# Altium PCB MapaSensorChassi002.PcbDoc
Units mil, origin at the board's own origin, x right, y up, seen from the top; angles counter-clockwise.
Board outline 6000 x 4000 mil, 2 copper layers (Top Layer, Bottom Layer); 26 components, 43 nets, 128 pads, 2 vias.
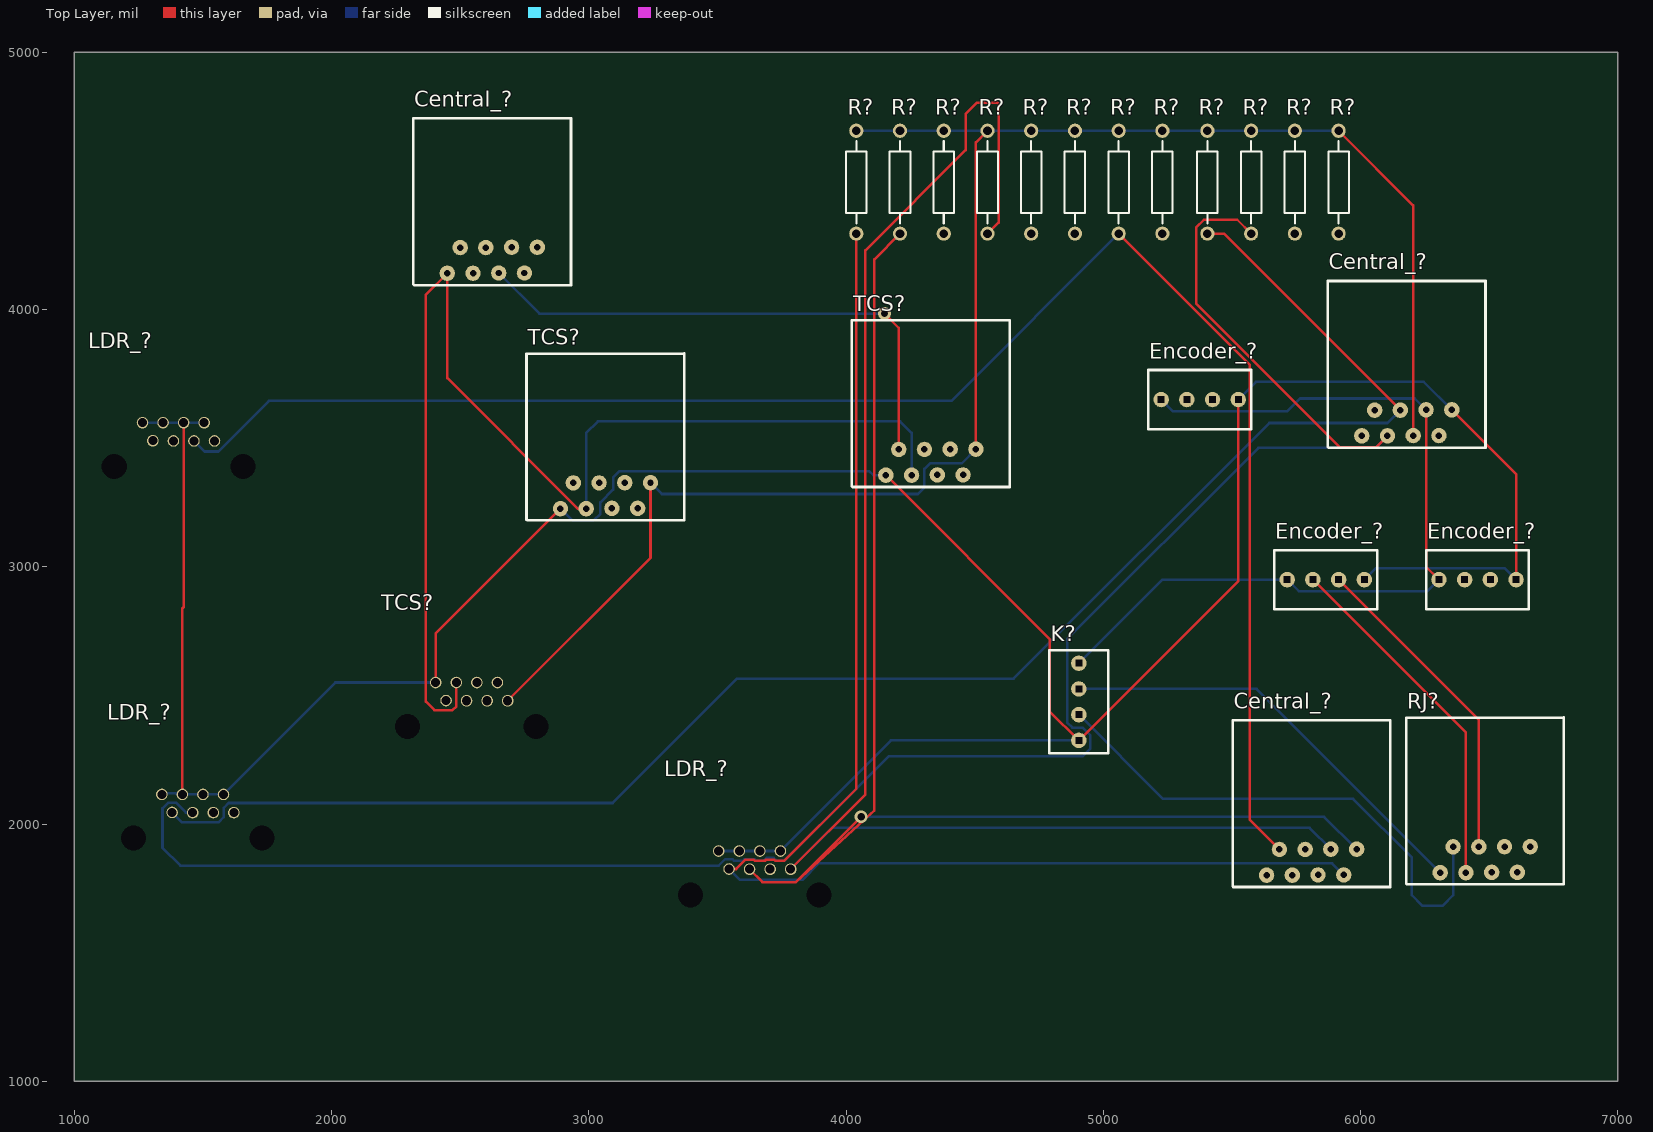
[diagram p0: Top Layer view]
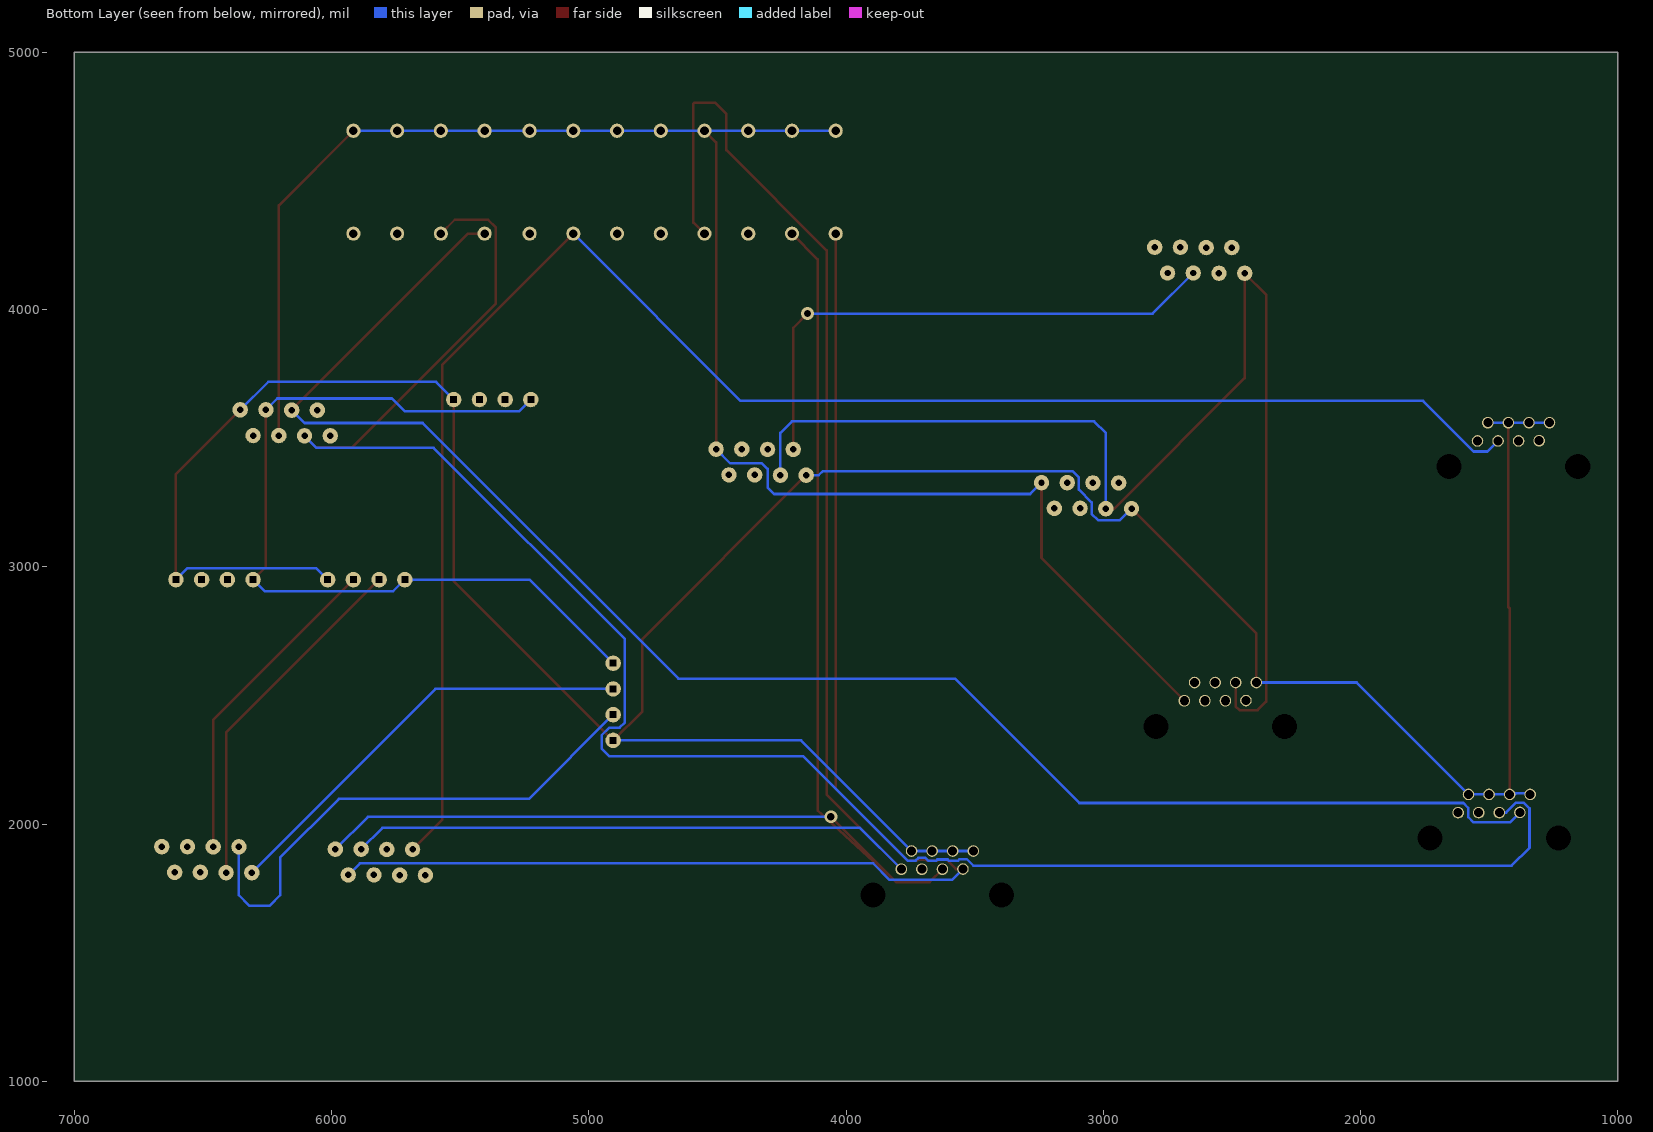
[diagram p1: Bottom Layer view, seen from below]
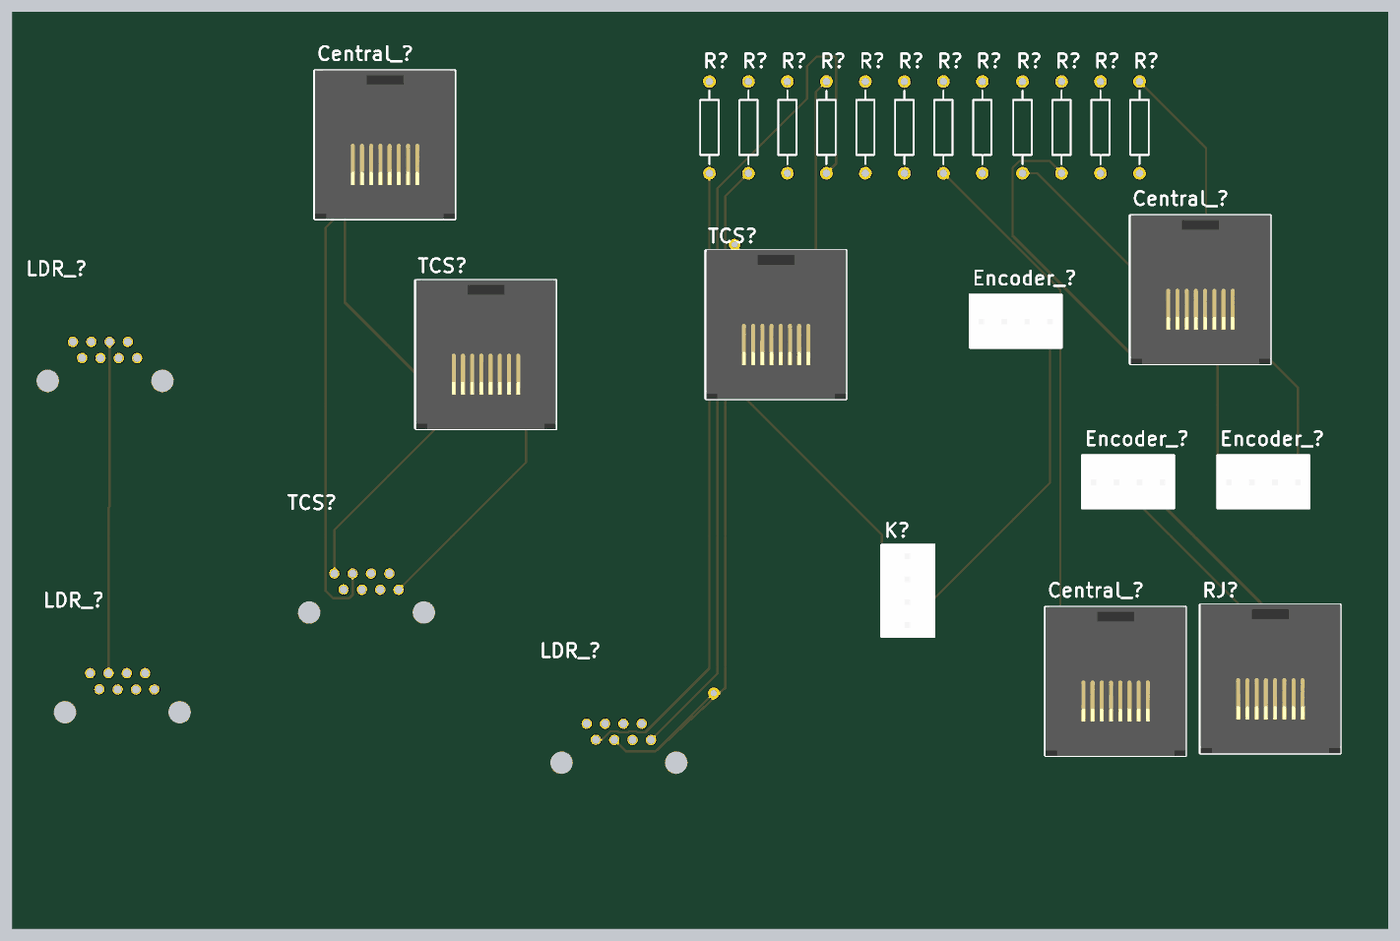
[diagram p2: 3D render of the assembled board from above, using the file's embedded part models]

## Layer stack, top to bottom
Top Solder: solder mask 0.4, Solder Resist, Dk 3.5
Top Layer: signal copper 1.4
Dielectric 1: dielectric 12.6, FR-4, Dk 4.8
Bottom Layer: signal copper 1.4
Bottom Solder: solder mask 0.4, Solder Resist, Dk 3.5

## Board outline
1000,1000 7000,1000 7000,5000 1000,5000

## Design rules (kind name [scope] priority, off if disabled: settings)
Clearance [All] p1: gap=10 ignorepadtopadclearanceinfootprint=FALSE except(0: Arc-Hole Track-Hole SMDPad-Hole THPad-Hole Via-Hole Fill-Hole Poly-Hole Region-Hole Text-Hole)
PolygonConnect [All] p1: connectstyle=Relief reliefconductorwidth=10 reliefentries=4 polygonreliefangle="90 Angle" airgapwidth=10
RoomDefinition MapaSensorChassi002 [InComponentClass('MapaSensorChassi002')] p1: confinementstyle=ConfineIn formatcopy=TRUE lockcomponents=FALSE outline 280,505 1040,505 1040,1035 280,1035
RoutingVias [All] p1: holewidth=28 width=50 viastyle="Through Hole" minholewidth=28 minwidth=50 maxholewidth=28 maxwidth=50
SolderMaskExpansion [All] p1: expansion=4
Width [All] p1: maxlimit=10 minlimit=10 preferedwidth=10
30 further rules are at their usual default settings.

## Classes and differential pairs
component class MapaSensorChassi002: Central_? Encoder_? K? LDR_? R? RJ? TCS?

## Components (designator, comment, footprint, x,y, rotation, side; value= is the part's Value field where it differs from the comment)
Central_? "RJ45" RJ45_90 5625,2260 r0 top
Central_? "RJ45" RJ45_90 2440,4600 r0 top
Central_? "RJ45" RJ45_90 5995,3968 r0 top
Encoder_? "Encoder_3" 4-vias 5715,2950 r90 top
Encoder_? "Encoder_2" 4-vias 6305,2950 r90 top
Encoder_? "Encoder1" 4-vias 5225,3650 r90 top
K? "Encoder_4" 4-vias 4905,2625 r0 top
LDR_? "RJ45" RJ45_Simples 3395.32,1724.92 r0 top
LDR_? "RJ45" RJ45_Simples 1155.32,3389.92 r0 top
LDR_? "RJ45" RJ45_Simples 1230.39,1944.92 r0 top
R? "Res2" AXIAL-0.4 5745,4495 r90 top value=1K
R? "Res2" AXIAL-0.4 5575,4495 r90 top value=1K
R? "Res2" AXIAL-0.4 4040,4495 r90 top value=1K
R? "Res2" AXIAL-0.4 4550,4495 r90 top value=1K
R? "Res2" AXIAL-0.4 4380,4495 r90 top value=1K
R? "Res2" AXIAL-0.4 4210,4495 r90 top value=1K
R? "Res2" AXIAL-0.4 5915,4495 r90 top value=1K
R? "Res2" AXIAL-0.4 5405,4495 r90 top value=1K
R? "Res2" AXIAL-0.4 5230,4495 r90 top value=1K
R? "Res2" AXIAL-0.4 4720,4495 r90 top value=1K
R? "Res2" AXIAL-0.4 4890,4495 r90 top value=1K
R? "Res2" AXIAL-0.4 5060,4495 r90 top value=1K
RJ? "RJ45" RJ45_90 6300,2270 r0 top
TCS? "RJ45" RJ45_Simples 2295.16,2379.92 r0 top
TCS? "RJ45" RJ45_90 4145,3815 r0 top
TCS? "RJ45" RJ45_90 2880,3685 r0 top

## Footprints (in the part's own frame and the unit in brackets; to place one, negate y for a bottom-side part, rotate by r counter-clockwise, add the part's x,y. Pads: shape width x height; smd on the part's side, far side on the other; paste and mask are expansions set on the pad)
4-vias [mil]
  round 60 hole 25.2 square: 1(0,0) 2(0,-100) 3(0,-200) 4(0,-300)
  silkscreen extent -115,-350 115,50, body extent -115,-350 115,50, height 460
AXIAL-0.4 [mm] "Axial Device, Thru-Hole; 2 Leads; 0.4 in Pin Spacing"
  round 1.4 hole 0.85: 1(-5.08,0) 2(5.08,0)
  silkscreen extent -4.06,-1.02 4.06,1.02
RJ45_90 [mil]
  round 60 hole 25.2: 1(360,-358) 2(310,-458) 3(260,-358) 4(210,-458) 5(160,-359) 6(110,-459) 7(60,-359) 8(10,-459)
  silkscreen extent -122,-505 491,144, body extent -119,-505 491,145, height 630
RJ45_Simples [mil] "Sem led nessas porra - 8P8C"
  round 0 hole 97.24: 0(0,0) 0(500,0)
  round 45 hole 35: 1(389.76,99.21) 2(349.61,170.08) 3(309.84,99.21) 4(269.68,170.08) 5(229.92,99.21) 6(189.76,170.08) 7(150,100) 8(109.84,170.08)
  body extent -61,-217 561,421, height 506

## Part data
Encoder_? Encoder_? Encoder_? K?: library part KK4Vias, ComponentLink1Description=Fabricante, ComponentLink1URL=https://www.molex.com/molex/products/family?key=kk_254_rpc_connector_system&channel=products&chanName=family&pageTitle=Introduction&parentKey=kk_interconnect_solutions
R? R? R? R? R? R? R? R? R? R? R? R?: "Resistor", LatestRevisionDate=17-Jul-2002, LatestRevisionNote="Re-released for DXP Platform.", PackageDescription="Axial Device, Thru-Hole; 2 Leads; 0.4 in Pin Spacing", PackageReference=AXIAL-0.4, Published=8-Jun-2000, Publisher="Altium Limited"

## Via types
v1: diameter 50, hole 28, Top Layer to Bottom Layer, 2 vias

## Nets (pads, with @x,y where several pads share a name; then routed paths per layer and width w, separated by ;. In a path a pad name is that pad's centre, name@x,y a point inside that pad or via, vN(x,y) a via of type N, cw(c..) or ccw(c..) an arc to the next point about the centre after c; other vN are vias at no path point)
3.3V: Central_?.3@6255,3610 Encoder_?.1 K?.1 | length 3339.8
  Top Layer w10: Central_?.3@6255,3610 6255,3000 Encoder_?.1@6305,2950
  Bottom Layer w10: K?.1 5230,2950 5715,2950 5760,2905 6260,2905 Encoder_?.1@6305,2950 ; Encoder_?.1@5225,3650 5270,3605 5716,3605 5765,3654 6211,3654 Central_?.3@6255,3610
5VCC: Central_?.4@6205,3510 R?.2 TCS?.1 | length 6912
  Top Layer w10: TCS?.1@2684.92,2479.13 3240,3034.21 TCS?.1@3240,3327 ; TCS?.1@4505,3457 4505,4650 R?.2@4550,4695 ; R?.2@5915,4695 6205,4405 Central_?.4@6205,3510
  Bottom Layer w10: TCS?.1@3240,3327 3284,3283 4280,3283 4305,3308 4305,3380 4327,3402 4450,3402 TCS?.1@4505,3457 ; R?.2@4040,4695 4210,4695 4380,4695 4550,4695 4720,4695 4890,4695 5060,4695 5230,4695 5405,4695 5575,4695 5745,4695 R?.2@5915,4695
GND: Central_?.1@6355,3610 Encoder_?.4 K?.4 LDR_?.2 LDR_?.4 LDR_?.6 LDR_?.8 TCS?.8 | length 12033.6
  Top Layer w10: LDR_?.6@1420.16,2115 1420.16,2838 1425,2842.84 LDR_?.4@1425,3560 ; TCS?.8@2405,2550 2405,2741 TCS?.8@2890,3226 ; TCS?.8@4155,3356 4792,2719 4792,2438 K?.4 5525,2945 Encoder_?.4@5525,3650 ; Central_?.1@6355,3610 6605,3360 Encoder_?.4@6605,2950
  Bottom Layer w10: LDR_?.8@1265.16,3560 1345.08,3560 1425,3560 LDR_?.2@1504.92,3560 ; LDR_?.8@1340.24,2115 1344.7,2119.47 1397.74,2119.47 1397.74,2115 1420.16,2115 1500.08,2115 1580,2115 2015,2550 TCS?.8@2405,2550 ; TCS?.8@2890,3226 2935,3181 3020,3181 3045,3206 3045,3250 3095,3300 3095,3347 3120,3372 4090,3372 4106,3356 TCS?.8@4155,3356 ; LDR_?.8@3505.16,1895 3585.08,1895 3665,1895 3744.92,1895 4174.92,2325 K?.4 ; Encoder_?.4@5525,3650 5594,3719 6246,3719 Central_?.1@6355,3610 ; Encoder_?.4@6015,2950 6060,2995 6560,2995 Encoder_?.4@6605,2950
NetCentral_1_1: 
NetCentral_1_2: 
NetCentral_1_3: 
NetCentral_1_4: 
NetCentral_1_5: 
NetCentral_1_6: 
NetCentral_1_7: 
NetCentral_1_8: 
NetCentral_2_1: 
NetCentral_2_2: 
NetCentral_2_3: 
NetCentral_2_4: 
NetCentral_2_5: 
NetCentral_2_6: 
NetCentral_2_7: 
NetCentral_2_8: 
NetCentral_3_5: 
NetCentral_3_6: 
NetCentral_3_7: 
NetCentral_3_8: 
NetCentral_?_1: Central_?.1@5985,1902 LDR_?.5@3625.24,1824.13 R?.1@4210,4295 | length 5235
  Top Layer w10: LDR_?.5@3625.24,1824.13 3675.37,1774 3805,1774 ; v1(4059,2028) 3805,1774 ; R?.1@4210,4295 4110,4195 4110,2052 4070.19,2015.72 3805,1774
  Bottom Layer w10: v1(4059,2028) 5859,2028 Central_?.1@5985,1902
NetCentral_?_2: Central_?.2@5935,1802 LDR_?.7@3545.32,1824.92 R?.1@4040,4295 | length 5241
  Top Layer w10: LDR_?.7@3545.32,1824.92 3572.99,1824.92 3609.7,1861.63 3640.77,1861.63 3644.9,1857.5 3685.49,1857.5 3689.62,1861.63 3720.69,1861.63 3724.83,1857.5 3760.46,1857.5 4040,2137.04 R?.1@4040,4295
  Bottom Layer w10: LDR_?.7@3545.32,1824.92 3587.24,1783 3830,1783 3894,1847 5890,1847 Central_?.2@5935,1802
NetCentral_?_3: Central_?.3@5885,1902 LDR_?.1@3785.08,1824.13 R?.1@4550,4295 | length 6089
  Top Layer w10: LDR_?.1@3785.08,1824.13 4075,2114.06 4075,4230 4465,4620 4465,4760 4509,4804 4589,4804 4593,4800 4593,4338 R?.1@4550,4295
  Bottom Layer w10: LDR_?.1@3785.08,1824.13 3945.84,1984.89 5802.11,1984.89 Central_?.3@5885,1902
NetCentral_?_4: Central_?.4@2650,4142 TCS?.7@4205,3456 | length 2116.2
  Top Layer w10: v1(4150,3984) 4205,3929 TCS?.7@4205,3456
  Bottom Layer w10: Central_?.4@2650,4142 2808,3984 v1(4150,3984)
NetCentral_?_5: Central_?.5@6155,3609 LDR_?.7@1380.39,2044.92 R?.1@5405,4295 | length 6509.9
  Top Layer w10: R?.1@5405,4295 5469,4295 Central_?.5@6155,3609
  Bottom Layer w10: LDR_?.7@1380.39,2044.92 1419.32,2006 1560,2006 1581,2027 1581,2062.97 1599.67,2081.63 3092.63,2081.63 3576,2565 4652,2565 5646,3559 6105,3559 Central_?.5@6155,3609
NetCentral_?_6: Central_?.6@6105,3509 LDR_?.5@1460.32,2044.13 R?.1@5575,4295 | length 7735.2
  Top Layer w10: R?.1@5575,4295 5521,4349 5391,4349 5362,4320 5362,4022 5920,3464 6060,3464 Central_?.6@6105,3509
  Bottom Layer w10: LDR_?.5@1460.32,2044.13 1434.22,2044.13 1395.35,2083 1365.44,2083 1342.89,2060.46 1342.89,1907.11 1412,1838 3505.36,1838 3530.36,1863 3559.2,1863 3565.2,1857 3600,1857 3605,1862 3644.97,1862 3649.47,1857.5 3680.53,1857.5 3691.35,1868.32 3718.57,1868.32 3729.39,1857.5 3760.46,1857.5 4165.96,2263 4920,2263 4950,2293 4950,2345 4920,2375 4880,2375 4860,2395 4860,2719 5603,3462 6058,3462 Central_?.6@6105,3509
NetCentral_?_7: Central_?.7@5685,1901 LDR_?.3@1465.16,3489.13 R?.1@5060,4295 | length 6615.6
  Top Layer w10: R?.1@5060,4295 5570,3785 5570,2016 Central_?.7@5685,1901
  Bottom Layer w10: LDR_?.3@1465.16,3489.13 1506.29,3448 1560,3448 1757,3645 4410,3645 R?.1@5060,4295
NetCentral_?_8: Central_?.8@2450,4141 TCS?.6 | length 4848.7
  Top Layer w10: TCS?.6@2484.92,2550 2484.92,2457.34 2470,2442.42 2400,2442.42 2367,2475.42 2367,4058 2450,4141 2450,3733 2957,3226 TCS?.6@2990,3226
  Bottom Layer w10: TCS?.6@2990,3226 2990,3520 3035,3565 4210,3565 4255,3520 TCS?.6@4255,3356
NetEncoder_1_2: 
NetEncoder_1_3: 
NetEncoder_2_2: 
NetEncoder_2_3: 
NetEncoder_3_2: 
NetEncoder_3_3: 
NetEncoder_?_2: Encoder_?.2@5815,2950 RJ?.6 | length 1385.5
  Top Layer w10: Encoder_?.2@5815,2950 6410,2355 RJ?.6
NetEncoder_?_3: Encoder_?.3@5915,2950 RJ?.5 | length 1264.7
  Top Layer w10: Encoder_?.3@5915,2950 6460,2405 RJ?.5
NetK3_2: 
NetK3_3: 
NetK?_2: K?.2 RJ?.8 | length 1700.7
  Bottom Layer w10: K?.2 5596,2525 RJ?.8
NetK?_3: K?.3 RJ?.7 | length 2052.4
  Bottom Layer w10: K?.3 5232,2098 5971,2098 6200,1869 6200,1723 6240,1683 6320,1683 6360,1723 RJ?.7
pads on no net: Central_?.1@2800,4242 Central_?.2@2750,4142 Central_?.2@6305,3510 Central_?.3@2700,4242 Central_?.4@5835,1802 Central_?.5@2600,4241 Central_?.5@5785,1901 Central_?.6@2550,4141 Central_?.6@5735,1801 Central_?.7@2500,4241 Central_?.7@6055,3609 Central_?.8@5635,1801 Central_?.8@6005,3509 Encoder_?.2@5325,3650 Encoder_?.2@6405,2950 Encoder_?.3@5425,3650 Encoder_?.3@6505,2950 LDR_?.0 LDR_?.1@1545.08,3489.13 LDR_?.1@1620.16,2044.13 LDR_?.3@1540.24,2044.13 LDR_?.3@3705.16,1824.13 LDR_?.5@1385.24,3489.13 LDR_?.7@1305.32,3489.92 R?.1@4380,4295 R?.1@4720,4295 R?.1@4890,4295 R?.1@5230,4295 R?.1@5745,4295 R?.1@5915,4295 RJ?.1 RJ?.2 RJ?.3 RJ?.4 TCS?.0 TCS?.2 TCS?.3 TCS?.4 TCS?.5 TCS?.7@2445.16,2479.92 TCS?.7@2940,3326